# Altium PCB TEST-GPS_RF-REV-C.PcbDoc
Units mm, origin at the board's own origin, x right, y up, seen from the top; angles counter-clockwise.
Board outline 30 x 50 mm, 2 copper layers (Top Layer, Bottom Layer), stack 1.671 mm thick; 30 components, 36 nets, 179 pads, 51 vias.
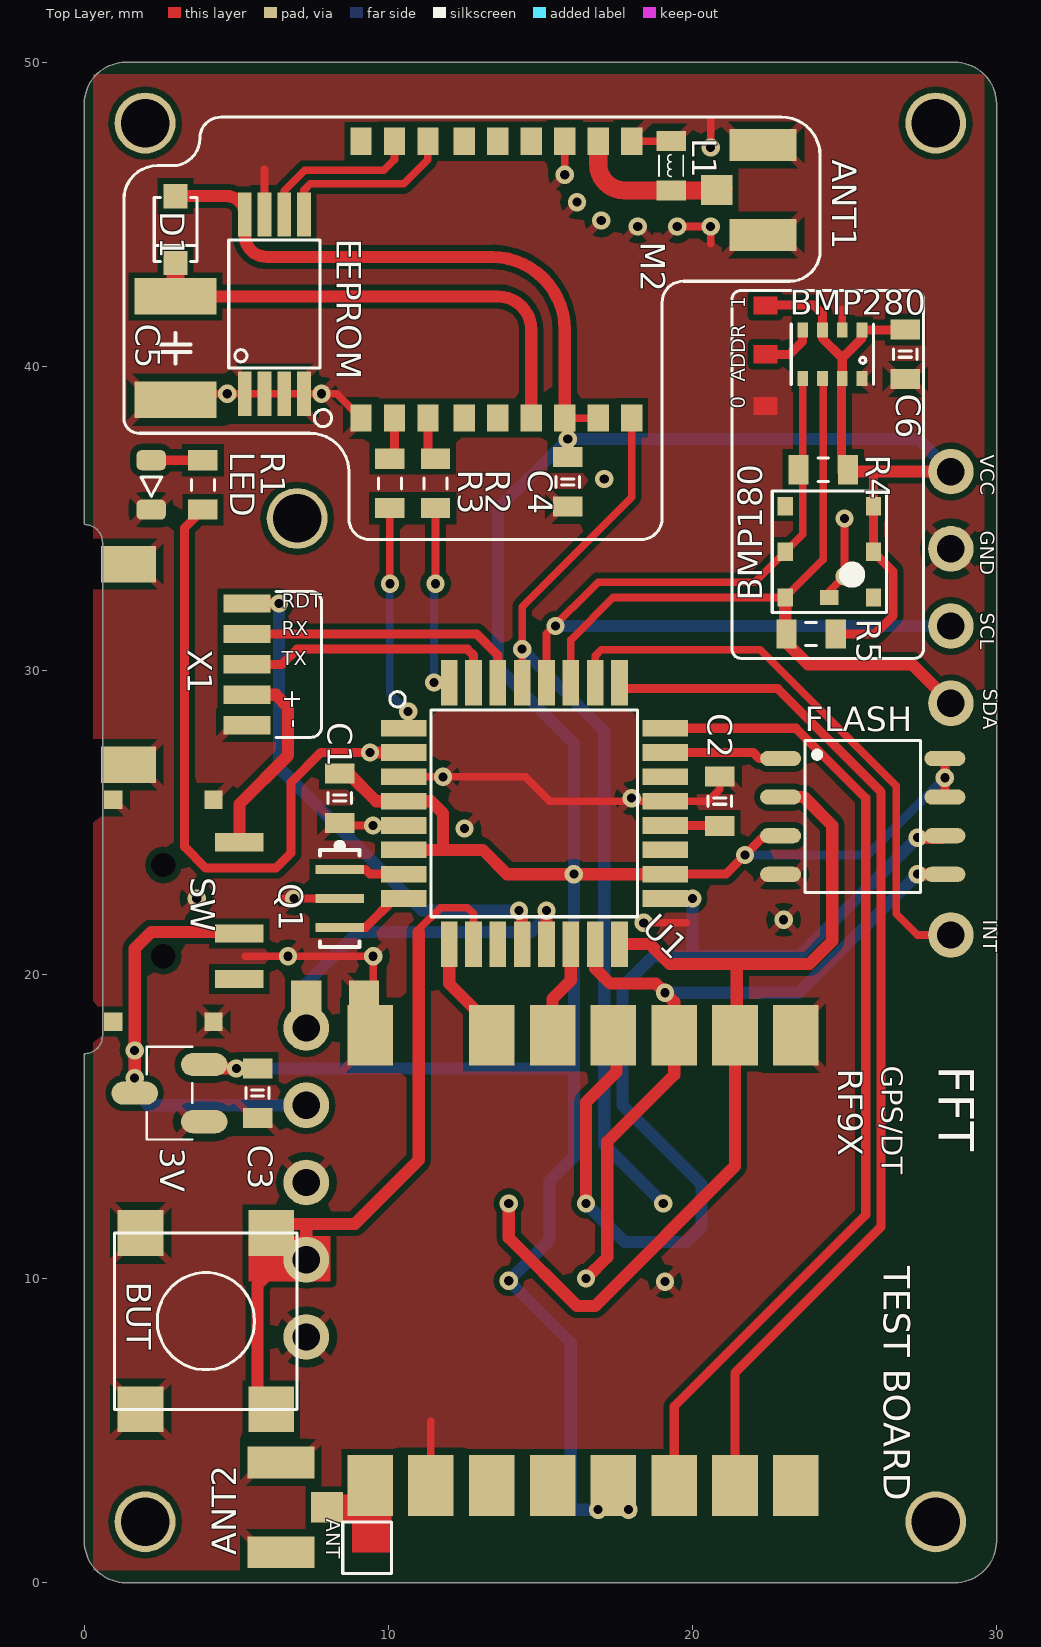
[diagram p0: Top Layer view]
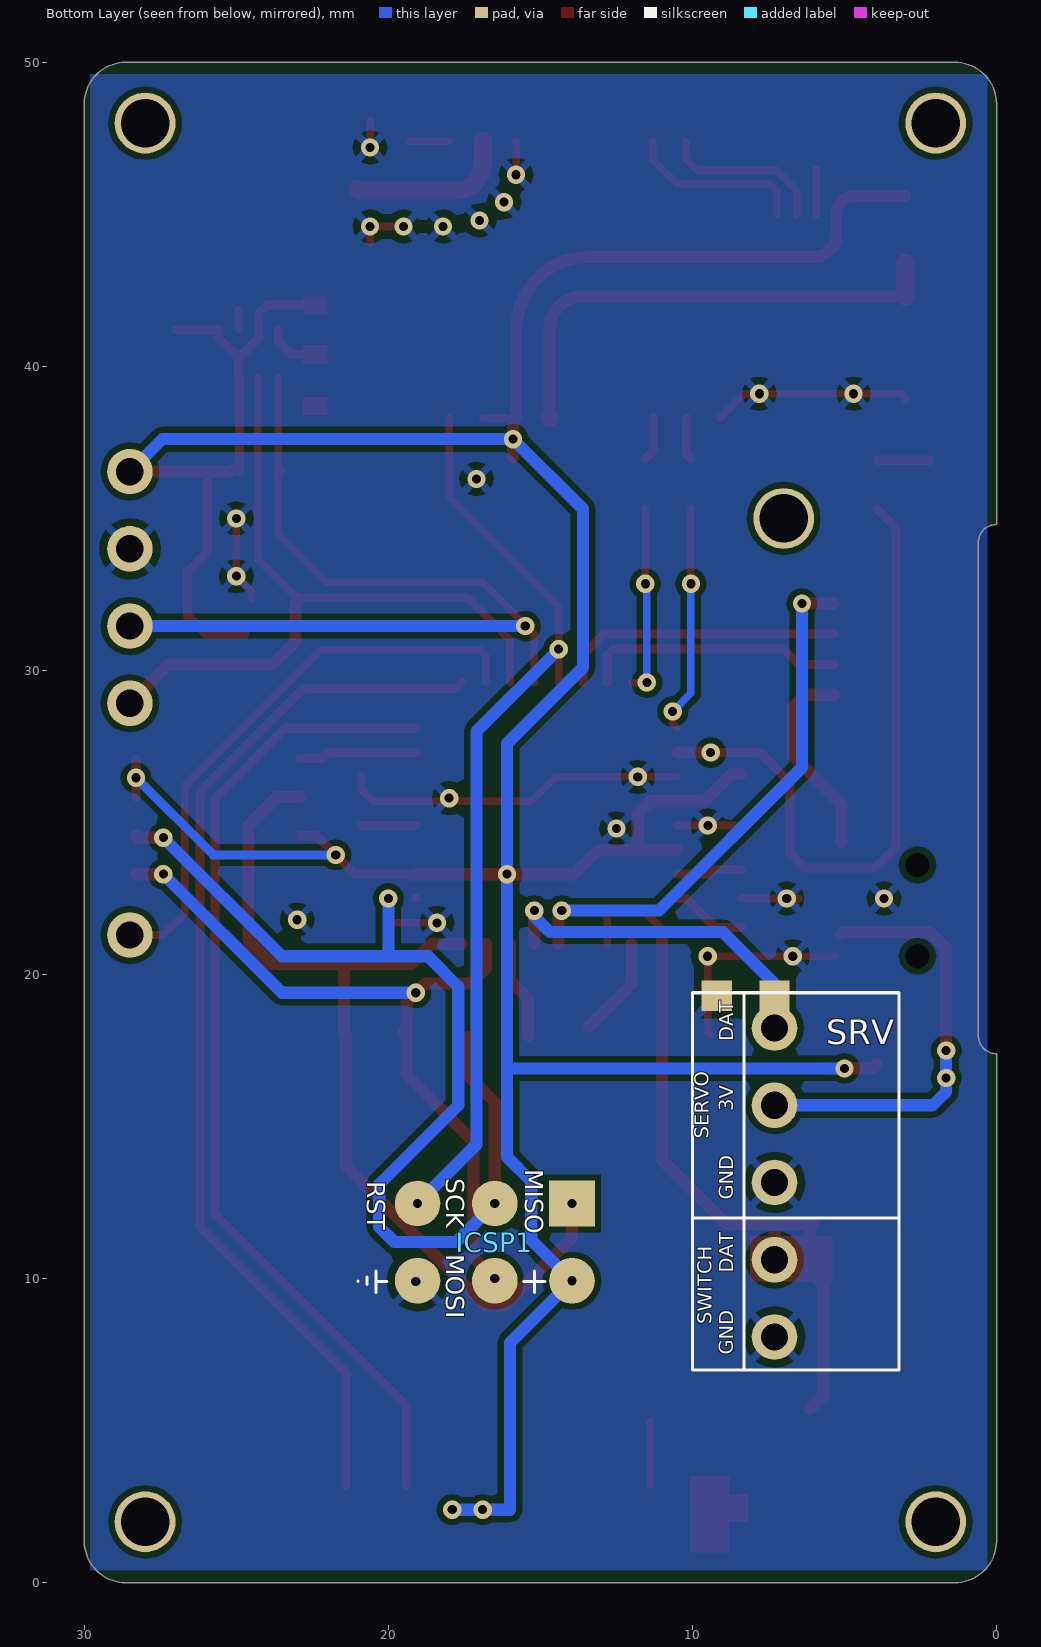
[diagram p1: Bottom Layer view, seen from below]
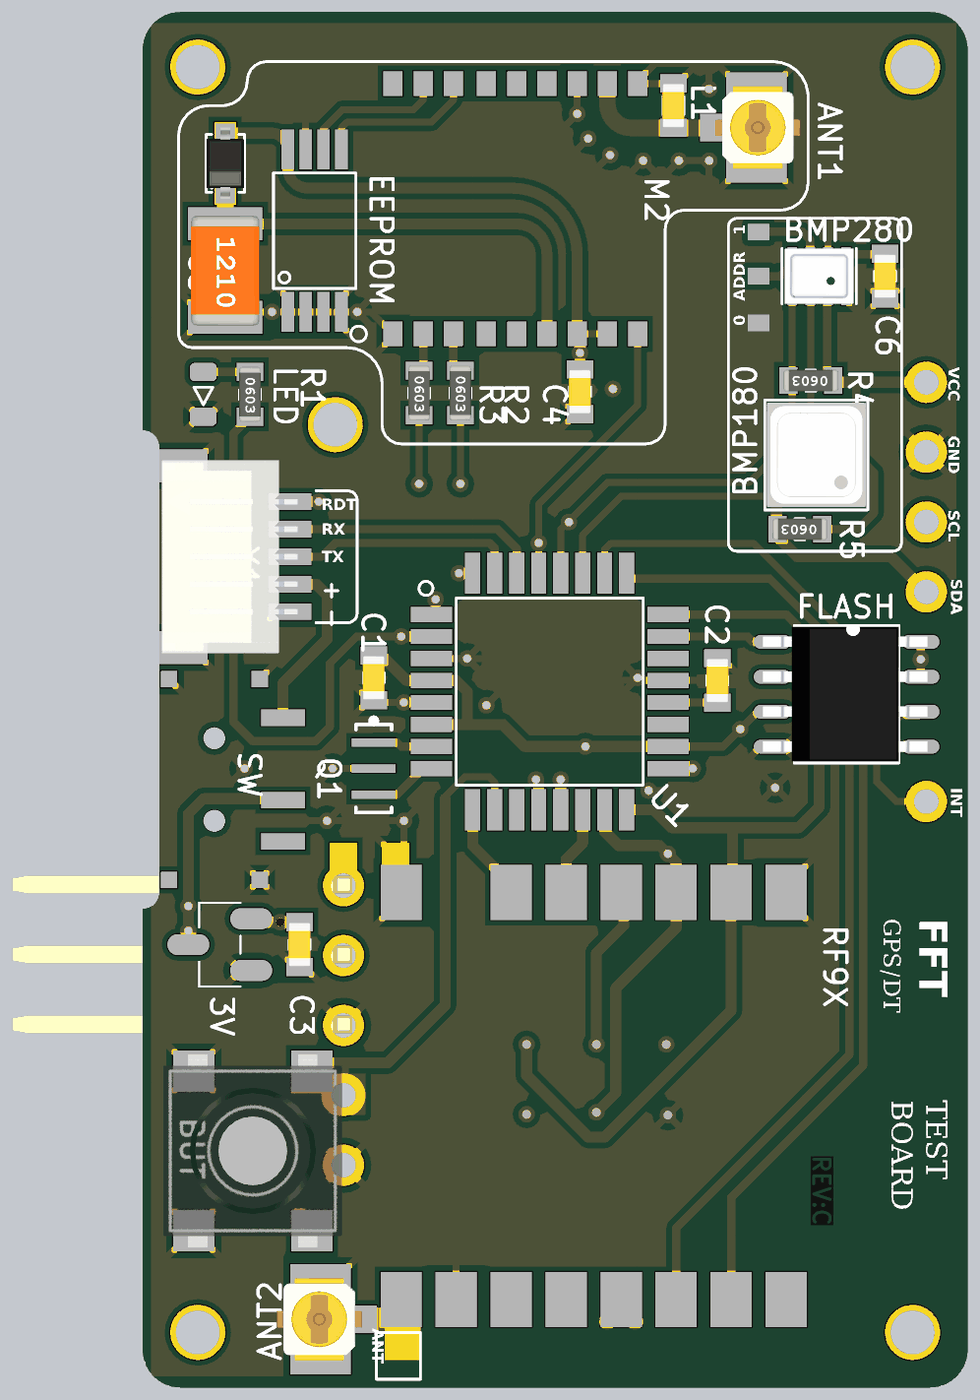
[diagram p2: 3D render of the assembled board from above, using the file's embedded part models]

## Layer stack, top to bottom
Top Solder: solder mask 0.0102, Solder Resist, Dk 3.5
Top Layer: signal copper 0.0356
Dielectric1: core 1.6, FR-4, Dk 4.8
Bottom Layer: signal copper 0.0356
Bottom Solder: solder mask 0.0102, Solder Resist, Dk 3.5

## Board outline
0,1.366 0,17.4 ccw(c0,18) 0.6,18 0.6,34.2 ccw(c0,34.2) 0,34.8 0,48.634 cw(c1.366,48.634) 1.366,50 28.634,50 cw(c28.634,48.634) 30,48.634 30,1.366 cw(c28.634,1.366) 28.634,0 1.366,0 cw(c1.366,1.366)

## Design rules (kind name [scope] priority, off if disabled: settings)
Clearance Clearance_POLY [IsRegion vs InNet('GND')] p1: gap=0.3 ignorepadtopadclearanceinfootprint=FALSE except(0: Arc-Hole Track-Hole SMDPad-Hole THPad-Hole Via-Hole Fill-Hole Poly-Hole Region-Hole Text-Hole)
Clearance [All] p2: gap=0.2 ignorepadtopadclearanceinfootprint=FALSE except(0: Arc-Hole Track-Hole SMDPad-Hole THPad-Hole Via-Hole Fill-Hole Poly-Hole Region-Hole Text-Hole)
ComponentClearance [All] p1: gap=0.05 collisioncheckmode=3 verticalgap=0.254 showdistances=FALSE
FanoutControl Fanout_LCC [IsLCC] p1: bgadir=Out bgaviamode=Centered fanoutstyle=Auto fanoutdirection=Alternating viagrid=0.025 // Fanout_LCC (Default Rule)
FanoutControl Fanout_BGA [IsBGA] p2: bgadir=Out bgaviamode=Centered fanoutstyle=Auto fanoutdirection=Alternating viagrid=0.025 // Fanout_BGA (Default Rule)
FanoutControl Fanout_Default [All] p4: bgadir=Out bgaviamode=Centered fanoutstyle=Auto fanoutdirection=Alternating viagrid=0.025 // Fanout_Default (Default Rule)
FanoutControl Fanout_Small [(CompPinCount < 5)] p5: bgadir=Out bgaviamode=Centered fanoutstyle=Auto fanoutdirection=OutThenIn viagrid=0.025 // Fanout_Small (Default Rule)
HoleSize [All] p1: absolutevalues=TRUE maxlimit=10 minlimit=0.2 maxpercent=80.000 minpercent=20.000
HoleToHoleClearance [All] p1: gap=0.54 allowstackedmicrovias=TRUE
MinimumSolderMaskSliver [All] p1 off: minsoldermaskwidth=0.254
PolygonConnect [All] p1: connectstyle=Relief reliefconductorwidth=0.254 reliefentries=4 polygonreliefangle="45 Angle" airgapwidth=0.254
RoutingVias [All] p1: holewidth=0.3 width=0.6 viastyle="Through Hole" minholewidth=0.2 minwidth=0.45 maxholewidth=1 maxwidth=3
SilkToSilkClearance [All] p1 off: silktosilkclearance=0.254
SilkToSolderMaskClearance [IsPad] p1 off: minsilkscreentomaskgap=0.254 clearancetoexposedcopper=TRUE
SolderMaskExpansion [All] p1: expansion=0.05
Width [All] p1: maxlimit=5 minlimit=0.2 preferedwidth=0.3
20 further rules are at their usual default settings.

## Components (designator, comment, footprint, x,y, rotation, side; value= is the part's Value field where it differs from the comment)
3V "3.3v" SOT23-3 2.8,16.1 r90 top
ANT1 "UFL-simple" UFL 22.387,45.775 r180 top
ANT2 "UFL-simple" UFL 6.4,2.5 r0 top
BMP180 "± 0.12 hPa equivalent to ±1 m" BMP180 24.5,33.9 r270 top
BMP280 "± 0.12 hPa equivalent to ±1 m" BMP280 24.6,40.4 r270 top
BUT "B3S-1002" "B3S-1002 FFT" 4,8.6 r0 top
C1 "0.1uF" C0603 8.4,25.8 r270 top
C2 "0.1uF" C0603 20.9,25.7 r90 top
C3 "1uF" C0603 5.7,16.1 r270 top
C4 "0.1uF" C0603 15.9,36.2 r90 top
C5 "100uF" C1210 3,40.6 r270 top
C6 "0.1uF" C0603 27,40.4 r270 top
D1 "1N4148" SOD-323 3,44.5 r270 top
EEPROM "-" "TSSOP - 8" 6.25,42.05 r90 top
FLASH "-" VSOP8 25.6,25.2 r0 top
ICSP1 "Progr ICSP" "ICSP prg PAD 2.54mm" 16.5,11.2 r270 bottom net-tie
L1 "33nH 400mA" L0603 19.3,46.6 r90 top
LED "GREEN" LED0603 2.2,36.1 r90 top
M2 "2.4GHz" MAX-M8Q 13.55,42.85 r270 top
Q1 "osc 8Mhz CSTCE8M0V53-R0_1" OSC_CSTCE16M0V53-R0 8.4,22.5 r270 top
R1 "430R" 0603 3.9,36.1 r270 top
R2 "22R" 0603 11.55,36.15 r270 top
R3 "22R" 0603 10.05,36.15 r270 top
R4 "4k7" 0603 24.3,36.6 r180 top
R5 "4k7" 0603 23.9,31.2 r180 top
RF9X "RFM95" RFM9X 8.4,18.6 r270 top
SRV "3ipn" "HDR1x3 angled" 7.3,15.7 r270 bottom
SW "" "SWITCH SLIDE" 2.6,22.1 r270 top
U1 "" "32-PIN QFP 10MM" 14.8,25.3 r0 top
X1 "1.0mm 5pin" "JST 5PIN 1MM" 3.4,30.2 r270 top

## Footprints (in the part's own frame and the unit in brackets; to place one, negate y for a bottom-side part, rotate by r counter-clockwise, add the part's x,y. Pads: shape width x height; smd on the part's side, far side on the other; paste and mask are expansions set on the pad)
"32-PIN QFP 10MM" [mm]
  rect 1.5x0.55 smd: 1(-4.3,2.8) 2(-4.3,2) 3(-4.3,1.2) 4(-4.3,0.4) 5(-4.3,-0.4) 6(-4.3,-1.2) 7(-4.3,-2) 8(-4.3,-2.8) 17(4.3,-2.8) 18(4.3,-2) 19(4.3,-1.2) 20(4.3,-0.4) 21(4.3,0.4) 22(4.3,1.2) 23(4.3,2) 24(4.3,2.8)
  rect 0.55x1.5 smd: 9(-2.8,-4.3) 10(-2,-4.3) 11(-1.2,-4.3) 12(-0.4,-4.3) 13(0.4,-4.3) 14(1.2,-4.3) 15(2,-4.3) 16(2.8,-4.3) 25(2.8,4.3) 26(2,4.3) 27(1.2,4.3) 28(0.4,4.3) 29(-0.4,4.3) 30(-1.2,4.3) 31(-2,4.3) 32(-2.8,4.3)
  silkscreen extent -4.75,-3.4 3.4,4, body extent -3.37,-3.37 3.37,3.37, height 1
0603 [mil] "0603 small package"
  rect 26x38 smd mask+1.97: 1(32,0) 2(-32,0)
  silkscreen extent -7,-15 7,15, body extent -39,-16 39,15, height 31
"B3S-1002 FFT" [mm] "SMD Tactile Button, 6.0 x 6.0 mm"
  rect 1.5x1.5 smd: 1(-2.15,-2.9) 1(-2.15,2.9) 2(2.15,-2.9) 2(2.15,2.9)
  silkscreen extent -3,-2.9 3,2.9, body extent -3.25,-3.5 3.25,3.5, height 3.1
BMP180 [mm] "Pressure sensor"
  rect 0.6x0.5 smd: 1(1.5,1.45) 2(0,1.45) 3(-1.5,1.45) 4(-1.5,-1.45) 5(0,-1.45) 6(1.5,-1.45)
  rect 0.5x0.6 smd: 7(1.5,0)
  silkscreen extent -2,-1.88 2,1.88, body extent -1.9,-1.8 1.9,1.8, height 0.98
BMP280 [mm] "Pressure sensor"
  rect 0.5x0.35 smd: 1(0.8,0.975) 2(0.8,0.325) 3(0.8,-0.325) 4(0.8,-0.975) 5(-0.8,-0.975) 6(-0.8,-0.325) 7(-0.8,0.325) 8(-0.8,0.975)
  silkscreen extent -1,-1.35 1,1.35, body extent -1,-1.25 1,1.25, height 1
C0603 [mil] "Capacitor 0603 body"
  rect 26x38 smd mask+1.97: 1(32,0) 2(-32,0)
  silkscreen extent -7,-15 7,15, body extent -31,-16 31,16, height 34
C1210 [mm] "SMD Capacitor 1210 3.2 mm × 2.5mm"
  rect 1.2x2.7 smd mask+0.05: 1(-1.7,0) 2(1.7,0)
  silkscreen extent -0.5,-0.5 0.5,0.5, body extent -2,-1.24 2,1.24, height 1.7
"HDR1x3 angled" [mm] "Connector; Pin Header; 3 Position"
  round 1.5 hole 0.9: 1(-2.54,0) 2(0,0) 3(2.54,0)
  silkscreen extent -3.7,-1 3.7,4.1, body extent -3.85,-0.32 3.78,12.04, height 2.75
"ICSP prg PAD 2.54mm" [mm] "pads only"
  rect 1.5x1.5 smd: 1(-1.27,2.54)
  round 1.5 smd: 2(1.27,2.54) 3(-1.27,0) 4(1.27,0) 5(-1.27,-2.54) 6(1.27,-2.54)
  silkscreen extent 0.95,-4.5 1.65,1.65
"JST 5PIN 1MM" [mm] "SMD"
  rect 0.6x1.55 smd: 1(-2,1.95) 2(-1,1.95) 3(0,1.95) 4(1,1.95) 5(2,1.95)
  rect 1.2x1.8 smd: 6(-3.3,-1.95) 6(3.3,-1.95)
  body extent -3.5,-2.7 3.5,2.25, height 2.9
L0603 [mil] "Inductor 0603 body"
  rect 26x38 smd mask+1.97: 1(32,0) 2(-32,0)
  silkscreen extent -14,-16 14,16, body extent -31,-16 31,16, height 34
LED0603 [mil] "LED 0603"
  rrect50% 26x38 smd mask+1.97: 1(32,0) 2(-32,0)
  silkscreen extent -15,-14 10,13, body extent -41,-20 39,20, height 15
MAX-M8Q [mm] "GPS module"
  rect 0.9x0.7 smd mask+0.05: 1(4.55,-4.45) 2(4.55,-3.35) 3(4.55,-2.25) 4(4.55,-1.05) 5(4.55,0.05) 6(4.55,1.15) 7(4.55,2.25) 8(4.55,3.35) 9(4.55,4.45) 10(-4.55,4.45) 11(-4.55,3.35) 12(-4.55,2.25) 13(-4.55,1.15) 14(-4.55,0.05) 15(-4.55,-1.05) 16(-4.55,-2.25) 17(-4.55,-3.35) 18(-4.55,-4.45)
  silkscreen extent 4.27,-5.98 4.83,-5.42, body extent -4.55,-4.8 4.55,4.8, height 2.6
OSC_CSTCE16M0V53-R0 [mm]
  rect 0.3x1.6 smd: 1(-0.95,0) 2(0,0) 3(0.95,0)
  silkscreen extent -1.83,-0.65 1.6,0.65
RFM9X [mm]
  rect 2x1.5 smd mask+0.05: 1(0.6,15) 2(0.6,13) 3(0.6,11) 4(0.6,9) 5(0.6,7) 6(0.6,5) 8(0.6,1) 9(15.4,15) 10(15.4,13) 11(15.4,11) 12(15.4,9) 13(15.4,7) 14(15.4,5) 15(15.4,3) 16(15.4,1)
  body extent 0,0 16,16, height 2
SOD-323 [mm] "SMD SOD323"
  rect 0.8x0.8 smd paste-0.05 mask+0.05: A(-1.1,0) K(1.1,0)
  silkscreen extent -1.05,-0.7 1.05,0.7, body extent -1.3,-0.68 1.3,0.67, height 1.1
SOT23-3 [mil] "SOT23 3pin"
  oval 30x60 smd: 1(-37,-45) 2(37,-45) 3(0,45)
  silkscreen extent -60,-30 60,30, body extent -60,-60 60,60, height 35
"SWITCH SLIDE" [mm]
  rect 0.6x1.6 smd: 1(-2.25,2.5) 2(0.75,2.5) 3(2.25,2.5)
  rect 0.6x0.6 smd: 4(-3.65,-1.65) 4(-3.65,1.65) 4(3.65,-1.65) 4(3.65,1.65)
  round 0.75 hole 0.8 unplated: 5(-1.5,0) 5(1.5,0)
  body extent -3.65,-3 3.7,1.95, height 1.4
"TSSOP - 8" [mm] "8 LEAD 4.4mm body"
  rect 1.45x0.45 smd: 1(-2.95,0.975) 2(-2.95,0.325) 3(-2.95,-0.325) 4(-2.95,-0.975) 5(2.95,-0.975) 6(2.95,-0.325) 7(2.95,0.325) 8(2.95,0.975)
  silkscreen extent -2.1,-1.5 2.1,1.5, body extent -2.1,-1.5 2.1,1.5, height 1
UFL [mm] "Connector"
  rect 1.05x1 smd: 1(1.587,-0.025)
  rect 2.2x1.05 smd: 2(0.063,-1.5) 3(0.063,1.45)
  body extent -1.53,-1.52 1.57,1.48, height 1.25
VSOP8 [mm] "8-Lead Plastic Micro Small Outline Package"
  oval 1.35x0.5 smd mask+0.05: 1(-2.7,1.905) 2(-2.7,0.635) 3(-2.7,-0.635) 4(-2.7,-1.905) 5(2.7,-1.905) 6(2.7,-0.635) 7(2.7,0.635) 8(2.7,1.905)
  silkscreen extent -1.9,-2.5 1.9,2.5, body extent -3.04,-2.45 2.94,2.45, height 1.55

## Part data
3V: library part AP2210N-3.3TRG1, "LDO 300 mA 3.3V"
ANT1 ANT2: library part "UFL - simple", "Connector"
BMP180: library part "BMP 180", "Pressure sensor BMP 180"
BMP280: library part "BMP 280", "Pressure sensor BMP 280"
BUT: "Single pole tactile switch, H=4.2mm"
C1 C2 C4 C6: library part C0603_0.1uF_50V, "C0603_0.1uF_50V"
C3: library part C0603_1uF_10V, "C0603_1uF_10V"
C5: library part C1210_100uF_250V, "C1210_10uF_250V"
D1: library part 1N4148WS-7-F, "Small signal diode"
EEPROM: library part 24AA32, "Memory EEPROM"
FLASH: library part W25Q64FV, "Memory Flash SPI 64MBit"
ICSP1: "PAD prog"
L1: library part L0603_33nH, "Inductor"
LED: library part LED_0603, "LED smd chip 0603"
M2: library part MAX-M8Q, "GPS module"
Q1: "8MHz Ceramic Resonator Built in Cap 15pF ±0.3% -20°C ~ 80°C SMD"
R1: library part R0603_430, "SMD resistor"
R2 R3: library part R0603_22, "SMD resistor"
R4 R5: library part R0603_4k7, "SMD resistor"
RF9X: "RF Transceiver"
SRV: library part "Header 3x1", "Header 3-Pin, 2.54mm"
SW: library part MK12C02, "Switch"
U1: library part 328p-AU-arduino, "CPU"
X1: library part SM05B-SRSS-TB, "Connector 5p hor 1mm"

## Free pads (board coordinates)
  round 2 hole 1.6 unplated: 2(2,2) 2(2,48) 2(7,35) 2(28,48) 2(28,2)
  round 1.5 hole 0.9: 3(28.5,21.3) 3(28.5,28.92) 3(28.5,31.46) 3(28.5,34) 3(28.5,36.54) 6(7.3,10.62) 7(7.3,8.08)
  rect 1x1 all layers, no hole: 4(9.2,19.3) 5(7.3,19.3)

## Via types
v1: diameter 0.6, hole 0.3, Top Layer to Bottom Layer, tented both sides, 51 vias

## Nets (pads, with @x,y where several pads share a name; then routed paths per layer and width w, separated by ;. In a path a pad name is that pad's centre, name@x,y a point inside that pad or via, vN(x,y) a via of type N, cw(c..) or ccw(c..) an arc to the next point about the centre after c; other vN are vias at no path point)
3V: 3V.2 BMP180.2 BMP180.3 BMP280.2 BMP280.6 BMP280.8 C1.2 C3.2 C4.1 C6.2 D1.A EEPROM.8 FLASH.3 FLASH.7 FLASH.8 ICSP1.2 M2.7 M2.8 pad.3@28.5,36.54 R4.2 R5.2 RF9X.12 U1.4 U1.6 U1.18 | length 135.7
  Top Layer w0.25: M2.7 M2.8
  Top Layer w0.3: U1.18@19.195,23.205 U1.18 21.1,23.3 v1(21.733,23.933) 22.365,24.565 FLASH.3 ; 22.3,42.013 23.987,42.013 24.275,41.725 BMP280.6 24.275,40.925 24.925,40.275 ; R5.2 26,31.2 26.6,31.8 26.6,33.25 BMP180.2 BMP180.3 25.95,36.49 ; R4.2@24.9,36.54 BMP280.2@24.9,39.575 ; BMP280.2 24.925,40.275 ; C6.2@26.987,41.2 BMP280.8 25.575,40.925 24.925,40.275 ; FLASH.7 v1(28.3,26.47) FLASH.8
  Top Layer w0.4: D1.A 4.675,45.6 cw(c4.675,45) EEPROM.8 5.275,44.325 ccw(c6,44.325) 6,43.6 13.4,43.6 cw(c13.4,41.2) 15.8,41.2 M2.7 cw(c15.8,38.2) 15.9,38.2 v1(15.9,37.606) C4.1 ; 3V.2 4.07,16.913 v1(5,16.913) C3.2 ; C1.2 8.687,26.613 9.6,25.7 U1.4 11.4,25.7 11.8,25.3 11.8,24.1 ; U1.6 11.8,24.1 ; U1.18 13.9,23.3 13.1,24.1 11.8,24.1 ; R4.2 25.173,36.54 pad.3@28.5,36.54
  Bottom Layer w0.3: v1(21.733,23.933) 25.763,23.933 v1(28.3,26.47)
  Bottom Layer w0.4: v1(5,16.913) 16.1,16.913 ; v1@16.8,2.4 16,2.4 16,7.89 v1(13.96,9.93) 15.3,11.27 15.3,13.2 16.1,14 16.1,16.913 ; v1(16.9,2.4) v1(17.9,2.4) ; pad.3@28.5,36.54 27.434,37.606 v1(15.9,37.606) 13.6,35.306 13.6,30.1 16.1,27.6 v1(16.1,23.3) 16.1,16.913
ADDR: BMP280.5 | length 1.9
  Top Layer w0.3: 22.3,40.387 23.187,40.387 23.625,40.825 BMP280.5
ANT: ANT2.1 RF9X.16
BAT_IN: 3V.3 SRV.2 SW.2 | length 15.4
  Top Layer w0.4: 3V.3 v1(1.657,16.6) v1(1.657,17.5) 1.657,20.857 2.2,21.4 5.05,21.4 SW.2
  Bottom Layer w0.4: v1@1.657,17.3 v1(1.657,16.6) 1.657,16.143 2.1,15.7 SRV.2
BUT: BUT.2 pad.6 U1.10 | length 24
  Top Layer w0.25: 11,21.4 11,21.485 11.715,22.2 12.6,22.2 12.8,22 U1.10
  Top Layer w0.4: BUT.2@6,11.8 7.3,11.8 ; BUT.2@6.15,5.7 5.7,6.15 5.7,9.8 6.15,10.25 BUT.2@6.15,11.5 ; pad.6 7.3,11.8 ; 11,21.4 11,13.9 8.9,11.8 7.3,11.8
DATA_RF: RF9X.11 U1.24 | length 32.8
  Top Layer w0.3: U1.24 23.4,28.1 25.7,25.8 25.7,12.1 19.4,5.8 RF9X.11
DATA_RF_2: RF9X.10 U1.25 | length 34.9
  Top Layer w0.3: U1.25 17.8,29.4 22.807,29.4 26.2,26.007 26.2,11.7 21.4,6.9 RF9X.10
DT: U1.12 X1.1 | length 17.5
  Top Layer w0.4: X1.1 v1(6.4,32.2) ; U1.12 v1@14.4,22.1
  Bottom Layer w0.4: v1(6.4,32.2) 6.4,26.81 11.11,22.1 v1(14.3,22.1) v1@14.4,22.1
GND: 3V.1 ANT1.2 ANT1.3 ANT2.2 ANT2.3 BMP180.7 BMP280.1 BMP280.7 BUT.1 C1.1 C2.1 C3.1 C4.2 C5.2 C6.1 EEPROM.1 EEPROM.2 EEPROM.3 EEPROM.4 EEPROM.7 FLASH.4 ICSP1.6 L1.1 LED.2 M2.1 M2.10 M2.12 pad.3@28.5,34 pad.4 pad.7 Q1.2 RF9X.1 RF9X.8 RF9X.15 SRV.3 SW.4@0.95,25.75 SW.4@4.25,18.45 SW.4@4.25,25.75 U1.3 U1.5 U1.21 X1.5 X1.6 | length 42
  Top Layer w0.25: C5.2 cw(c3.2,38.9) 3.2,39.1 EEPROM.1 EEPROM.2 EEPROM.3 EEPROM.4 v1(7.8,39.1) 8.3,39.1 M2.1 ; 5.3,20.6 v1(6.7,20.6) v1(9.5,20.6) 9.5,18.1 RF9X.8 ; EEPROM.7 5.925,46.475 ; 6.5,22.5 Q1.2 ; C1.1@8.487,24.9 v1(9.494,24.9) U1.5 ; U1.3 v1(11.8,26.5) 14.5,26.5 15.3,25.7 U1.21 20.5,25.7 20.9,26.1 C2.1 ; RF9X.15 11.4,5.3 ; v1(15.8,46.3) M2.12 ; M2.10 19.287,47.4 L1.1 ; v1(18.4,21.7) 19.8,21.7 ; v1(19.5,44.6) v1(20.6,44.6) 20.6,44.035 ; v1(20.6,47.2) 20.6,48.1 ; BMP180.7 24.5,32.6 v1(25,33.1) v1(25,35) ; BMP280.7 24.925,41.875
  other v1: 19.1,9.9 23,21.8 3.7,22.5 6.9,22.5 12.5,24.8 18,25.8 17.1,36.3 4.7,39.1 18.2,44.6 17,44.8 16.2,45.4
"GPS ANT": ANT1.1 L1.2 M2.11 | length 5.6
  Top Layer w0.6: M2.11 16.9,46.654 ccw(c17.767,46.654) 17.767,45.787 L1.2 20.988,45.787 ANT1.1@20.988,45.8 ; ANT1.1 ANT1.1@20.988,45.8 ; ANT1.1@21.013,45.825 cw(c20.988,45.825) ANT1.1@20.988,45.8
GSCL: EEPROM.6 M2.17 | length 5.4
  Top Layer w0.25: EEPROM.6 6.575,45.775 7.25,46.45 9.85,46.45 10.2,46.8 M2.17
GSDA: EEPROM.5 M2.16 | length 5.9
  Top Layer w0.25: EEPROM.5 7.225,45.789 7.436,46 10.5,46 11.3,46.8 M2.16
INT_GYRO: pad.3@28.5,21.3 U1.26 | length 19
  Top Layer w0.25: U1.26 16.8,30.475 17,30.675 22.225,30.675 26.7,26.2 26.7,22 27.4,21.3 pad.3@28.5,21.3
LED_STATUS: R1.1 U1.2 | length 21.8
  Top Layer w0.3: R1.1 3.3,34.687 3.3,24.2 4,23.5 6.3,23.5 6.8,24 6.8,26.321 7.779,27.3 v1(9.4,27.3)
  Top Layer w0.4: v1(9.4,27.3) U1.2
MEM_CS: FLASH.1 U1.23 | length 3.9
  Top Layer w0.3: U1.23 22,27.3 22.2,27.1 22.895,27.1 FLASH.1
MISO: FLASH.2 ICSP1.1 RF9X.2 U1.16 | length 31.5
  Top Layer w0.4: v1(13.96,12.47) 13.96,11.34 16.2,9.1 16.8,9.1 21.4,13.7 RF9X.2 ; U1.16 18.6,21 19.255,20.345 21.455,20.345 ; RF9X.2@21.455,18.055 21.455,20.345 ; FLASH.2 23.665,25.835 24.6,24.9 24.6,21.1 23.845,20.345 21.455,20.345
MOSI: FLASH.5 ICSP1.4 RF9X.3 U1.15 | length 25.1
  Top Layer w0.4: v1(16.5,10) 17.2,10.7 17.2,14.5 19.4,16.7 RF9X.3 ; U1.15 16.8,20.2 17.3,19.7 18.8,19.7 v1(19.1,19.4) 19.4,19.1 RF9X.3 ; RF9X.3@19.5,18.1 RF9X.3 ; v1(27.4,23.3) 28.295,23.3 FLASH.5
  Bottom Layer w0.4: v1(19.1,19.4) 23.5,19.4 v1(27.4,23.3)
NetC2_2: C2.2 U1.20 | length 1.8
  Top Layer w0.3: U1.20 C2.2@20.887,24.9
NetLED_1: LED.1 R1.2 | length 1.7
  Top Layer w0.3: LED.1 R1.2
NetM2_2: M2.2 R3.2 | length 1.4
  Top Layer w0.3: R3.2 10.2,37.113 M2.2
NetM2_3: M2.3 R2.2 | length 1.4
  Top Layer w0.3: M2.3 11.3,37.213 R2.2
NetQ1_1: Q1.1 U1.7 | length 2.2
  Top Layer w0.3: Q1.1 9.25,23.45 9.4,23.3 U1.7
NetQ1_3: Q1.3 U1.8 | length 2.5
  Top Layer w0.3: Q1.3 9.25,21.55 10.2,22.5 U1.8
NetSW_1: SW.1 X1.4 | length 6.6
  Top Layer w0.4: SW.1 5.1,25.6 6.7,27.2 6.7,28.8 6.3,29.2 X1.4
NSS: RF9X.5 U1.14 | length 3.2
  Top Layer w0.4: RF9X.5 15.4,19.2 16,19.8 U1.14
"RESET RF": RF9X.6 U1.9 | length 3.3
  Top Layer w0.4: U1.9 12,19.7 RF9X.6@13.4,18.3
RST: ICSP1.5 M2.9 U1.29 | length 30.3
  Top Layer w0.25: U1.29 v1(14.4,30.7) 14.4,32.1 18,35.7 M2.9
  Bottom Layer w0.4: v1(14.4,30.7) 17.1,28 17.1,14.41 v1(19.04,12.47)
RX: U1.30 X1.2 | length 9.4
  Top Layer w0.3: X1.2 12.9,31.2 13.6,30.5 U1.30
RX_GPS: R3.1 U1.1 | length 7.5
  Top Layer w0.25: v1(10.05,32.85) R3.1 ; U1.1 10.65,28.25 v1(10.65,28.65)
  Bottom Layer w0.25: v1(10.05,32.85) 10.05,29.25 v1(10.65,28.65)
SCK: FLASH.6 ICSP1.3 RF9X.4 U1.17 | length 34.1
  Top Layer w0.3: RF9X.4 RF9X.4@17.5,17.9
  Top Layer w0.4: v1(16.5,12.47) 16.5,15.8 17.5,16.8 RF9X.4@17.5,17.9 ; v1(27.4,24.5) 28.235,24.5 FLASH.6
  Bottom Layer w0.4: v1(16.5,12.47) 17.77,11.2 19.8,11.2 20.3,11.7 20.3,13.1 17.7,15.7 17.7,19.6 18.7,20.6 20,20.6 ; v1(20,22.5) 20,20.6 ; v1(27.4,24.5) 23.5,20.6 20,20.6
SCL: BMP180.5 BMP280.4 pad.3@28.5,31.46 R4.1 U1.28 | length 29.9
  Top Layer w0.25: U1.28 15.2,31.2 16.9,32.9 22.05,32.9 BMP180.5 23.625,34.475 R4.1@23.625,36.462 ; R4.1 R4.1@23.625,36.462 ; R4.1@23.625,36.6 R4.1@23.625,36.462 ; BMP280.4 R4.1@23.625,36.462 ; R4.1@23.66,36.427 R4.1@23.625,36.462
  Bottom Layer w0.4: v1(15.5,31.46) pad.3@28.5,31.46
SDA: BMP180.6 BMP280.3 pad.3@28.5,28.92 R5.1 U1.27 | length 24.5
  Top Layer w0.25: U1.27 16,31 17.4,32.4 BMP180.6 24.3,33.65 BMP280.3@24.3,39.6
  Top Layer w0.4: BMP180.6 23.05,30.95 23.8,30.2 27.22,30.2 pad.3@28.5,28.92
SERVO: pad.5 SRV.1 U1.13 | length 11.6
  Top Layer w0.4: U1.13 v1(15.2,22.1)
  Bottom Layer w0.4: SRV.1 pad.5 7.3,19.7 9,21.4 14.69,21.4 15.2,21.91 v1(15.2,22.1)
TX: U1.31 X1.3 | length 8.6
  Top Layer w0.3: X1.3 6.5,30.2 7,30.7 12.6,30.7 12.8,30.5 U1.31
TX_GPS: R2.1 U1.32 | length 6.4
  Top Layer w0.25: v1(11.5,29.6) U1.32 ; v1(11.55,32.85) R2.1
  Bottom Layer w0.25: v1(11.5,29.6) 11.5,32.8 11.45,32.85 v1(11.55,32.85)
V_BCKP: C5.1 D1.K M2.6 | length 16.3
  Top Layer w0.4: C5.1 13.6,42.3 cw(c13.6,41.2) 14.7,41.2 M2.6
  Top Layer w0.6: C5.1 D1.K
pads on no net: BMP180.1 BMP180.4 M2.4 M2.5 M2.13 M2.14 M2.15 M2.18 RF9X.9 RF9X.13 RF9X.14 SW.3 SW.4@0.95,18.45 SW.5 U1.11 U1.19 U1.22

## Polygon pours and split planes (outlines as drawn)
GND on Top Layer "Top Layer-No Net" (solid, remove dead copper, pour order 2): 0.3,0.4 0.3,49.6 29.6,49.6 29.6,0.4
GND on Bottom Layer "Top Layer-No Net" (solid, remove dead copper, pour order 0): 0.3,0.4 0.3,49.6 29.8,49.6 29.8,0.4

## Other copper
Top Layer:
  rectangle net ADDR: 22,40.1 22.8,40.7
  rectangle net GND: 22,38.4 22.8,39
  rectangle net 3V: 22,41.7 22.8,42.3
  rectangle net ANT: 8.8,1 10.1,3.5
  rectangle net BUT: 5.4,9.9 8.1,11.4
  rectangle net ANT: 8.15,2 9.5,2.9

## Silkscreen, mask and mechanical layers (free items; w line width, h text height)
Top Overlay:
  lines w0.1: 6.3,27.8 7.459,27.8 ccw(c7.459,28.141) 7.7,27.9 ccw(c7.459,28.141) 7.8,28.141 7.8,30.3 ; 6.3,32.6 7.459,32.6 cw(c7.459,32.259) 7.7,32.5 cw(c7.459,32.259) 7.8,32.259 7.8,30.1 ; 1.3,38.3 ccw(c1.8,38.3) 1.8,37.8 7.43,37.8 cw(c7.43,36.53) 8.7,36.53 8.7,35 ccw(c9.4,35) 9.4,34.3 18.3,34.3 ccw(c18.3,35) 19,35 19,42.1 cw(c19.7,42.1) 19.7,42.8 22.9,42.8 23.2,42.8 ccw(c23.2,43.8) 24.2,43.8 24.2,44.07 24.2,46.93 ccw(c22.93,46.93) 22.93,48.2 4.5,48.2 ccw(c4.5,47.5) 3.8,47.5 cw(c2.9,47.5) 2.9,46.6 2.4,46.6 ccw(c2.4,45.5) 1.3,45.5 1.3,38.3 ; 8.5,0.3 10.1,0.3 10.1,2 8.5,2 8.5,0.3 ; 21.3,30.7 ccw(c21.6,30.7) 21.6,30.4 26.2,30.4 27.3,30.4 ccw(c27.3,30.7) 27.6,30.7 27.6,42.2 ccw(c27.3,42.2) 27.3,42.5 21.6,42.5 ccw(c21.6,42.2) 21.3,42.2 21.3,30.7
  text "1" at 21.9,41.9 h0.8 r90
  text "ADDR" at 21.9,39.5 h0.8 r90
  text "0" at 21.9,38.6 h0.8 r90
  text "VCC" at 29.3,37.1 h0.8 r270
  text "GND" at 29.3,34.6 h0.8 r270
  text "RDT" at 6.5,31.9 h0.8
  text "SCL" at 29.3,31.9 h0.8 r270
  text "RX" at 6.5,31 h0.8
  text "TX" at 6.5,30 h0.8
  text "+" at 7.1,29.4 h0.6 r90
  text "SDA" at 29.4,29.4 h0.8 r270
  text "-" at 7.1,28.4 h0.6 r90
  text "INT" at 29.4,21.8 h0.8 r270
  text "GPS/DT" at 26,17 h1.2 r270
  text "FFT" at 27.7,17 h2 r270
  text "TEST BOARD" at 26,10.4 h1.5 r270
  text "ANT" at 7.8,2.1 h0.8 r270
Bottom Overlay:
  lines w0.1: 3.2,12 3.2,7 8.3,7 ; 8.3,19.4 10,19.4 10,7 8.3,7 ; 10,12 8.3,12 8.3,7
  text "DAT" at 8.5,17.8 h0.8 r270
  text "3V" at 8.5,15.5 h0.8 r270
  text "SERVO" at 9.3,14.6 h0.8 r270
  text "GND" at 8.5,12.6 h0.8 r270
  text "DAT" at 8.5,10.2 h0.8 r270
  text "SWITCH" at 9.2,8.5 h0.8 r270
  text "GND" at 8.5,7.5 h0.8 r270
Top Paste:
  rectangle: 22,41.7 22.8,42.3
  rectangle: 22,38.4 22.8,39
  rectangle: 22,40.1 22.8,40.7
Top Solder:
  rectangle: 22,41.7 22.8,42.3
  rectangle: 22,38.4 22.8,39
  rectangle: 22,40.1 22.8,40.7
  rectangle: 8.8,1 10.1,3.5
  text "REV:C" at 24.4,8.5 h0.6 r270
Mechanical 2:
  the board outline again, w0.1
Courtyard Bottom:
  lines w0.127: -24.915,16.18 -19.835,16.18 ; 40.11,-32.08 40.11,-27 ; 113.135,-32.08 113.135,-27 ; 139.805,-19.38 254.105,-19.38 ; 139.805,-11.76 254.105,-11.76 ; 139.805,-4.14 177.905,-4.14 ; 177.905,-27 177.905,-11.76 177.905,3.48 ; 186.16,-32.08 186.16,-27 ; 231.245,-27 231.245,-11.76 ; 254.105,16.18 259.185,16.18 ; 254.105,64.44 259.185,64.44 ; 254.105,112.7 259.185,112.7 ; 139.805,-27 108.817,-27 108.817,3.48 139.805,3.48 ; 139.805,-27 254.105,-27 ; 139.805,-27 139.805,3.48 ; 139.805,3.48 177.905,3.48 ; 177.905,3.48 254.105,3.48 254.105,-27 ; 254.105,-27 -19.835,-27 -19.835,155.88 254.105,155.88 254.105,-27 ; -24.915,-32.08 259.185,-32.08 259.185,160.96 -24.915,160.96 -24.915,-32.08
  text "2" at 75.975,157.531 h0.9
  text "4" at 222.025,157.531 h0.9
  text "A" at 256.01,134.519 h0.9
  text "B" at 256.01,86.462 h0.9
  text "C" at 256.01,37.948 h0.9
  text "ENGINEER:" at 141.075,0.94 h0.9
  text "TITLE:" at 179.175,0.94 h0.9
  text "Artis Kirsteins" at 142.585,-2.08 h2
  text "GPS_RF" at 186.585,-6.08 h3
  text "DATE:" at 141.075,-6.553 h0.9
  text ".PRINT_DATE" at 142.585,-9.58 h2
  text "D" at -23.01,-10.058 h0.9
  text "D" at 256.01,-10.058 h0.9
  text "FILE NAME:" at 141.075,-14.3 h0.9
  text "DESCRIPTION:" at 179.175,-14.3 h0.9
  text "REV:" at 232.515,-14.3 h0.9
  text ".PCB_FILE_NAME_NO_PATH" at 142.585,-17.08 h1.5
  text "GPS RFM95 module with CPU" at 182.585,-17.08 h2
  text "REV C" at 239.585,-17.08 h2
  text "ORIGINAL SIZE:" at 232.585,-21.58 h0.9
  text "ADDITIONAL INFO:" at 141.075,-21.92 h0.9
  text "VARIANT:" at 179.175,-21.92 h0.9
  text "A4" at 246.585,-22.08 h2
  text ".Print_Scale" at 232.585,-23.58 h0.9
  text "- - -" at 143.585,-25.08 h0.9
  text ".VariantName" at 182.585,-25.08 h2
  text "All dimensions in mm" at 234.085,-26.08 h0.9
  text "1" at 3.331,-30.429 h0.9
  text "2" at 75.975,-30.429 h0.9
  text "3" at 149.127,-30.429 h0.9
  text "4" at 222.025,-30.429 h0.9

## Dimensions
1.366,0 to 1.366,50 on Courtyard Bottom
0,1.366 to 30,1.366 on Courtyard Bottom

## Text inside footprints (layer, text, board x,y; h text height)
ICSP1: Bottom Overlay "RST" at 20.7,13.2 h0.6 r90; Bottom Overlay "SCK" at 18.1,13.3 h0.6 r90; Bottom Overlay "MOSI" at 18.1,10.8 h0.6 r90; Bottom Overlay "MISO" at 15.5,13.6 h0.6 r90
M2: Assembly Top "MAX-M8Q" at 13.05,46.55 h1.1 r270